# EAGLE board volctrl (EAGLE 7.5.0)
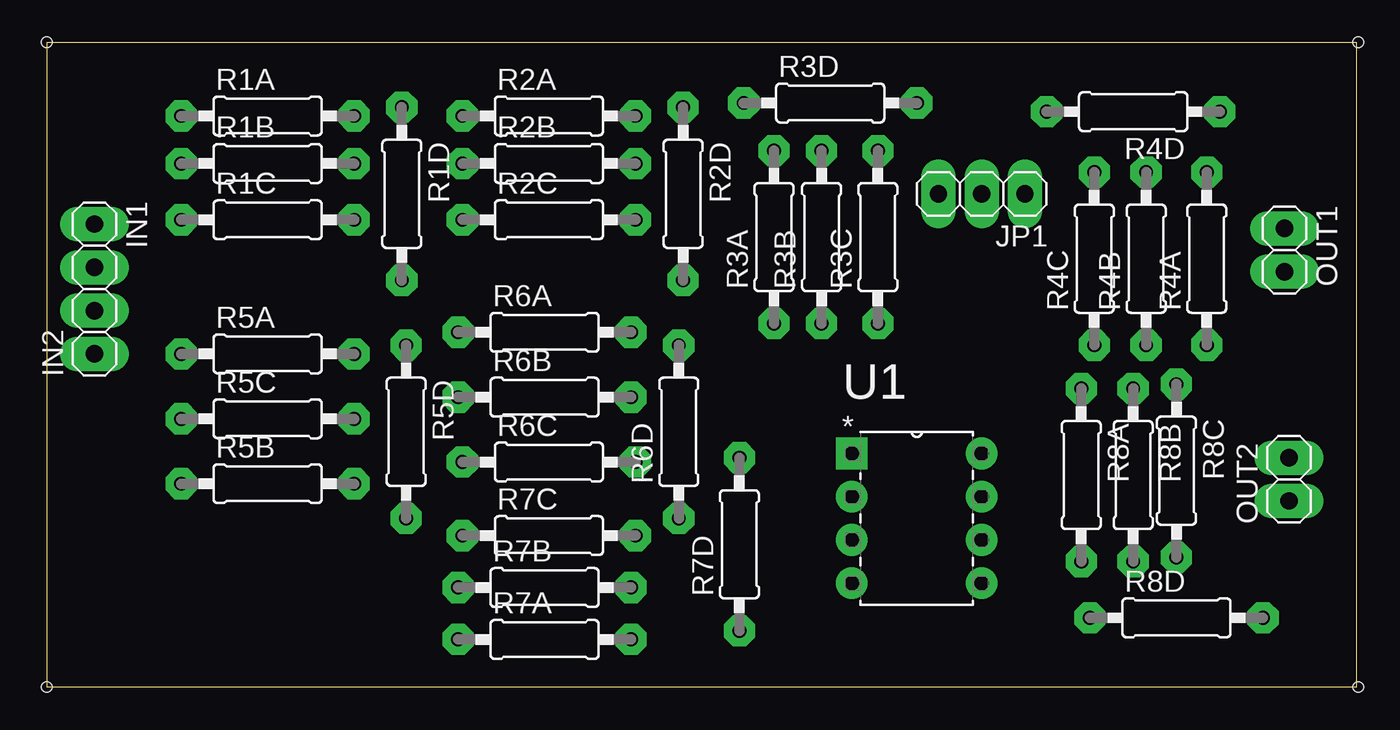
[diagram p0: board, top side]
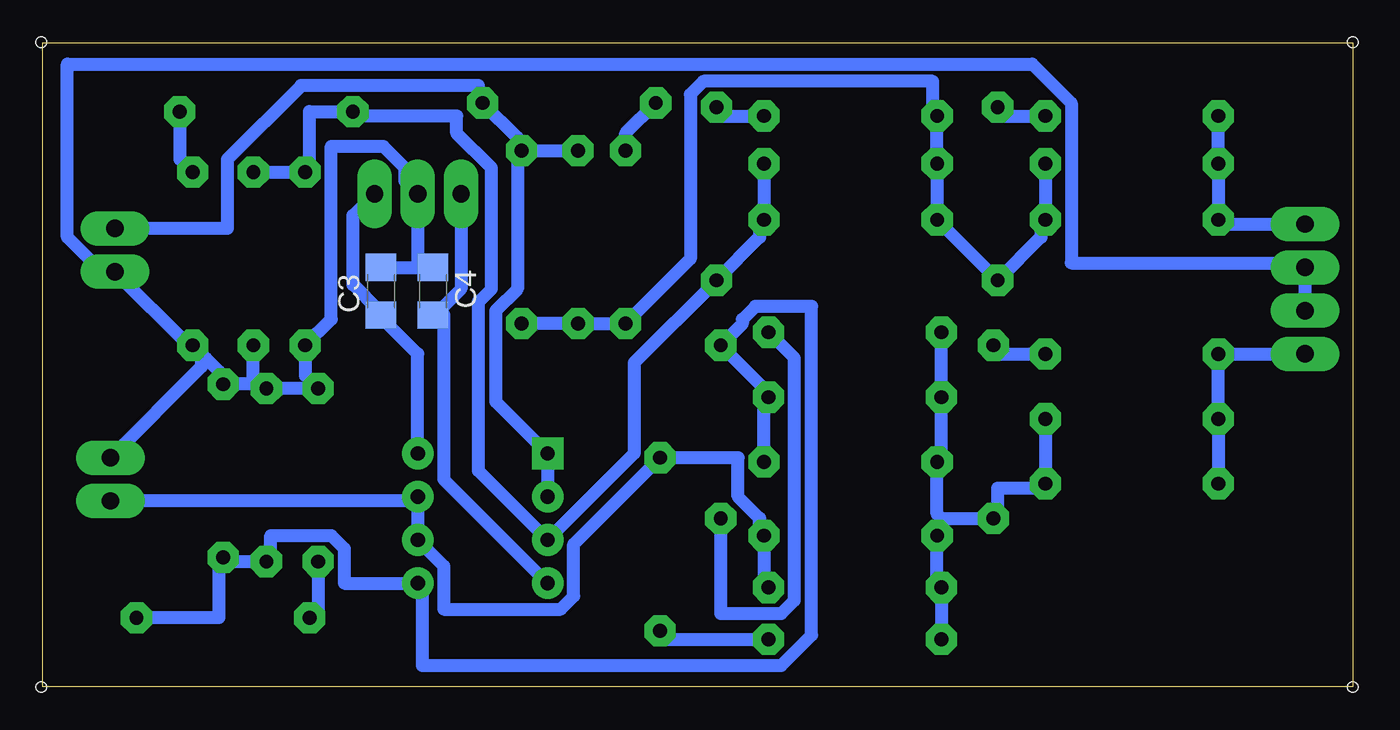
[diagram p1: board, bottom side, seen from below]

Size 76.89 x 37.84 mm. Coordinates in mm from the lower left corner, seen from the top.
Outline: 0,0 76.89,0 76.89,37.84 0,37.84 0,0
Copper layers (1*16): Top 0.035mm / dielectric 1.5mm / Bottom 0.035mm
Design rules "default *": minimum track width 30mil, minimum drill 24mil, track to track 8mil, track to pad 8mil, pad to pad 8mil, via to via 8mil, smd to smd 8mil, copper to edge 40mil, drill to drill 8mil, minimum pad ring 20mil, minimum via ring 8mil, stop-mask expansion 4mil, vias tented up to drill 0mil, thermal gap 10mil
Holes 0.6 mm at 0,37.85 76.96,37.85 76.96,0 0,0

## Footprints (pad centres in the part's own frame; a part is rotated, then mirrored left to right if it is on the bottom)
C1206 = smd 1.6 x 1.8: 1 -1.4,0; 2 1.4,0
1X02 = drill 1.016 long: 1 -1.27,0; 2 1.27,0
1X03 = drill 1.016 long: 1 -2.54,0; 2 0,0; 3 2.54,0
0207/10 = drill 0.813 octagon: 1 -5.08,0; 2 5.08,0
DIP254P762X508-8 = drill 0.838 square: 1 -7.62,7.62 | drill 0.838: 2 -7.62,5.08; 3 -7.62,2.54; 4 -7.62,0; 5 0,0; 6 0,2.54; 7 0,5.08; 8 0,7.62

## Placement (x,y rotation side)
C3  100n  [C1206]  57.02,23.24 90 bottom
C4  100n  [C1206]  53.98,23.24 270 bottom
IN1  [1X02]  2.79,25.91 270 top
IN2  [1X02]  2.79,20.83 90 top
JP1  [1X03]  54.86,28.96 180 top
OUT1  [1X02]  72.64,25.65 270 top
OUT2  [1X02]  72.9,12.19 90 top
R1A  [0207/10]  12.95,33.53 0 top
R1B  [0207/10]  12.95,30.73 0 top
R1C  [0207/10]  12.95,27.43 0 top
R1D  [0207/10]  20.83,28.96 270 top
R2A  [0207/10]  29.46,33.53 0 top
R2B  [0207/10]  29.46,30.73 0 top
R2C  [0207/10]  29.46,27.43 0 top
R2D  [0207/10]  37.34,28.96 270 top
R3A  [0207/10]  42.67,26.42 90 top
R3B  [0207/10]  45.47,26.42 90 top
R3C  [0207/10]  48.77,26.42 90 top
R3D  [0207/10]  45.97,34.29 0 top
R4A  [0207/10]  68.07,25.15 90 top
R4B  [0207/10]  64.52,25.15 90 top
R4C  [0207/10]  61.47,25.15 90 top
R4D  [0207/10]  63.75,33.78 180 top
R5A  [0207/10]  12.95,19.56 0 top
R5B  [0207/10]  12.95,11.94 0 top
R5C  [0207/10]  12.95,15.75 0 top
R5D  [0207/10]  21.08,14.99 270 top
R6A  [0207/10]  29.21,20.83 0 top
R6B  [0207/10]  29.21,17.02 0 top
R6C  [0207/10]  29.46,13.21 0 top
R6D  [0207/10]  37.08,14.99 90 top
R7A  [0207/10]  29.21,2.79 0 top
R7B  [0207/10]  29.21,5.84 0 top
R7C  [0207/10]  29.46,8.89 0 top
R7D  [0207/10]  40.64,8.38 90 top
R8A  [0207/10]  60.71,12.45 270 top
R8B  [0207/10]  63.75,12.45 270 top
R8C  [0207/10]  66.29,12.7 270 top
R8D  [0207/10]  66.29,4.06 0 top
U1  TL072CP  [DIP254P762X508-8]  54.86,6.1 0 top

## Library data of the parts
C3 C4 R1A R1B R1C R1D R2A R2B R2C R2D R3A R3B R3C R3D R4A R4B R4C R4D R5A R5B R5C R5D R6A R6B R6C R6D R7A R7B R7C R7D R8A R8B R8C R8D = rcl
IN1 IN2 JP1 OUT1 OUT2 = pinhead
U1 = tl072; MPN: TL072CP; OC_FARNELL: 1106015; OC_NEWARK: 60K6988; PACKAGE: PDIP; SUPPLIER: Texas Instruments

## Nets
N$2: IN1.1 R1A.1 R1B.1 R1C.1
N$3: R6B.2 R6C.2 R6D.2 R8B.2 R8C.2 R8D.2 U1.5
N$4: OUT2.1 R7B.2 R7C.2 R7D.2 U1.6 U1.7
N$6: C4.2 JP1.3 U1.4
N$8: C3.1 JP1.1 U1.8
N$10: OUT1.1 R3B.2 R3C.2 R3D.2 U1.1 U1.2
N$11: R1A.2 R1D.1
N$13: R2B.2 R2C.2 R2D.2 R4B.2 R4C.2 R4D.2 U1.3
N$14: R2A.2 R2D.1
N$15: C3.2 C4.1 IN1.2 IN2.2 JP1.2 OUT1.2 OUT2.2 R4A.1 R4B.1 R4C.1 R8A.1 R8B.1 R8C.1
N$17: R4A.2 R4D.1
N$18: R1B.2 R1C.2 R1D.2 R2A.1 R2B.1 R2C.1 R3A.1 R3B.1 R3C.1
N$20: R3A.2 R3D.1
N$22: IN2.1 R5A.1 R5B.1 R5C.1
N$23: R5A.2 R5D.1
N$25: R6A.2 R6D.1
N$27: R8A.2 R8D.1
N$28: R5B.2 R5C.2 R5D.2 R6A.1 R6B.1 R6C.1 R7A.1 R7B.1 R7C.1
N$29: R7A.2 R7D.1

## Tracks (layer width: path | path; a pad name or v marks a point on that pad's centre or on a via)
N$2
  Bottom 0.762: R1A.1 R1B.1 R1C.1 7.62,27.18 IN1.1
N$3
  Bottom 0.762: R6C.2 34.54,16.76 R6B.2 34.54,17.27 34.54,17.53 R6D.2 35.81,21.34 35.81,21.59 35.05,22.35 31.75,22.35 31.75,3.05 33.53,1.27 54.61,1.27 54.61,5.84 U1.5 59.18,6.1 59.18,8.13 59.94,8.89 63.5,8.89 63.5,7.62 R8B.2 66.29,7.37 R8C.2 66.55,7.11 66.55,4.06 R8D.2
N$4
  Bottom 0.762: R7B.2 34.54,6.1 R7C.2 34.8,9.14 34.8,9.91 36.07,11.18 36.07,13.46 R7D.2 45.72,8.38 45.72,5.33 46.48,4.57 53.34,4.57 53.34,7.11 U1.6 U1.7 55.12,10.92 OUT2.1
N$6
  Bottom 0.762: JP1.3 52.32,23.37 53.85,21.84 C4.2 53.34,21.84 53.34,12.19 U1.4
N$8
  Bottom 0.762: U1.8 54.86,19.56 56.9,21.59 C3.1 57.15,22.1 58.67,23.62 58.67,27.69 JP1.1
N$10
  Bottom 0.762: U1.2 U1.1 50.29,16.76 50.29,22.1 49.02,23.37 49.02,31.24 R3C.2 | R3C.2 R3B.2 | R3C.2 49.02,31.75 49.02,32.26 R3D.2 51.31,34.54 51.31,35.31 61.72,35.31 66.04,30.99 66.04,26.92 OUT1.1
N$11
  Bottom 0.762: R1A.2 20.83,33.53 R1D.1
N$13
  Bottom 0.762: R4B.2 R4C.2 61.21,30.48 61.21,33.78 R4D.2 58.42,33.53 52.58,33.53 52.58,32.51 50.55,30.48 50.55,23.37 51.31,22.61 51.31,12.7 U1.3 42.16,13.72 42.16,19.05 R2D.2 34.8,26.42 34.8,27.18 R2C.2 R2B.2
N$14
  Bottom 0.762: R2A.2 37.34,33.53 R2D.1
N$15
  Bottom 0.762: C3.2 56.9,24.64 54.1,24.64 C4.1 54.86,24.89 JP1.2 55.63,29.72 55.63,30.48 56.9,31.75 59.94,31.75 59.94,21.59 R4C.1 61.47,18.29 R8A.1 R8B.1 | IN2.2 IN1.2 3.05,24.89 16.51,24.89 16.51,34.29 18.8,36.58 75.44,36.58 75.44,26.42 73.66,24.64 72.9,24.64 OUT1.2 68.33,20.07 R4A.1 67.31,19.3 | R8B.1 64.01,17.78 R8C.1 66.55,18.03 66.55,18.54 67.31,19.3 | R4B.1 64.52,18.03 R8B.1 | OUT2.2 67.56,18.8 67.56,19.05 67.31,19.3
N$17
  Bottom 0.762: R4A.2 68.83,30.99 R4D.1
N$18
  Bottom 0.762: R3C.1 R3B.1 R3A.1 38.86,25.15 38.86,34.8 38.1,35.56 24.64,35.56 24.64,33.78 R2A.1 R2B.1 R2C.1 R1D.2 18.29,26.42 18.29,27.18 R1C.2 R1B.2
N$20
  Bottom 0.762: R3D.1 42.67,32.51 R3A.2
N$22
  Bottom 0.762: R5B.1 R5C.1 R5A.1 IN2.1
N$23
  Bottom 0.762: R5A.2 21.08,19.56 R5D.1
N$25
  Bottom 0.762: R6A.2 32.77,19.3 32.77,5.08 33.53,4.32 37.08,4.32 R6D.1
N$27
  Bottom 0.762: R8D.1 60.71,4.57 R8A.2
N$28
  Bottom 0.762: R5C.2 R5B.2 18.29,11.68 20.83,11.68 20.83,10.16 R5D.2 24.13,9.91 | R7A.1 R7B.1 24.38,6.1 R7C.1 24.13,9.14 24.13,9.91 | 24.13,9.91 24.38,10.16 R6C.1 24.13,13.46 R6B.1 R6A.1
N$29
  Bottom 0.762: R7A.2 40.64,2.79 R7D.1